# Altium PCB Sheet1.PcbDoc
Units mil, origin at the board's own origin, x right, y up, seen from the top; angles counter-clockwise.
Board outline 1640 x 1090 mil, 2 copper layers (Top Layer, Bottom Layer); 21 components, 16 nets, 60 pads, 4 vias.
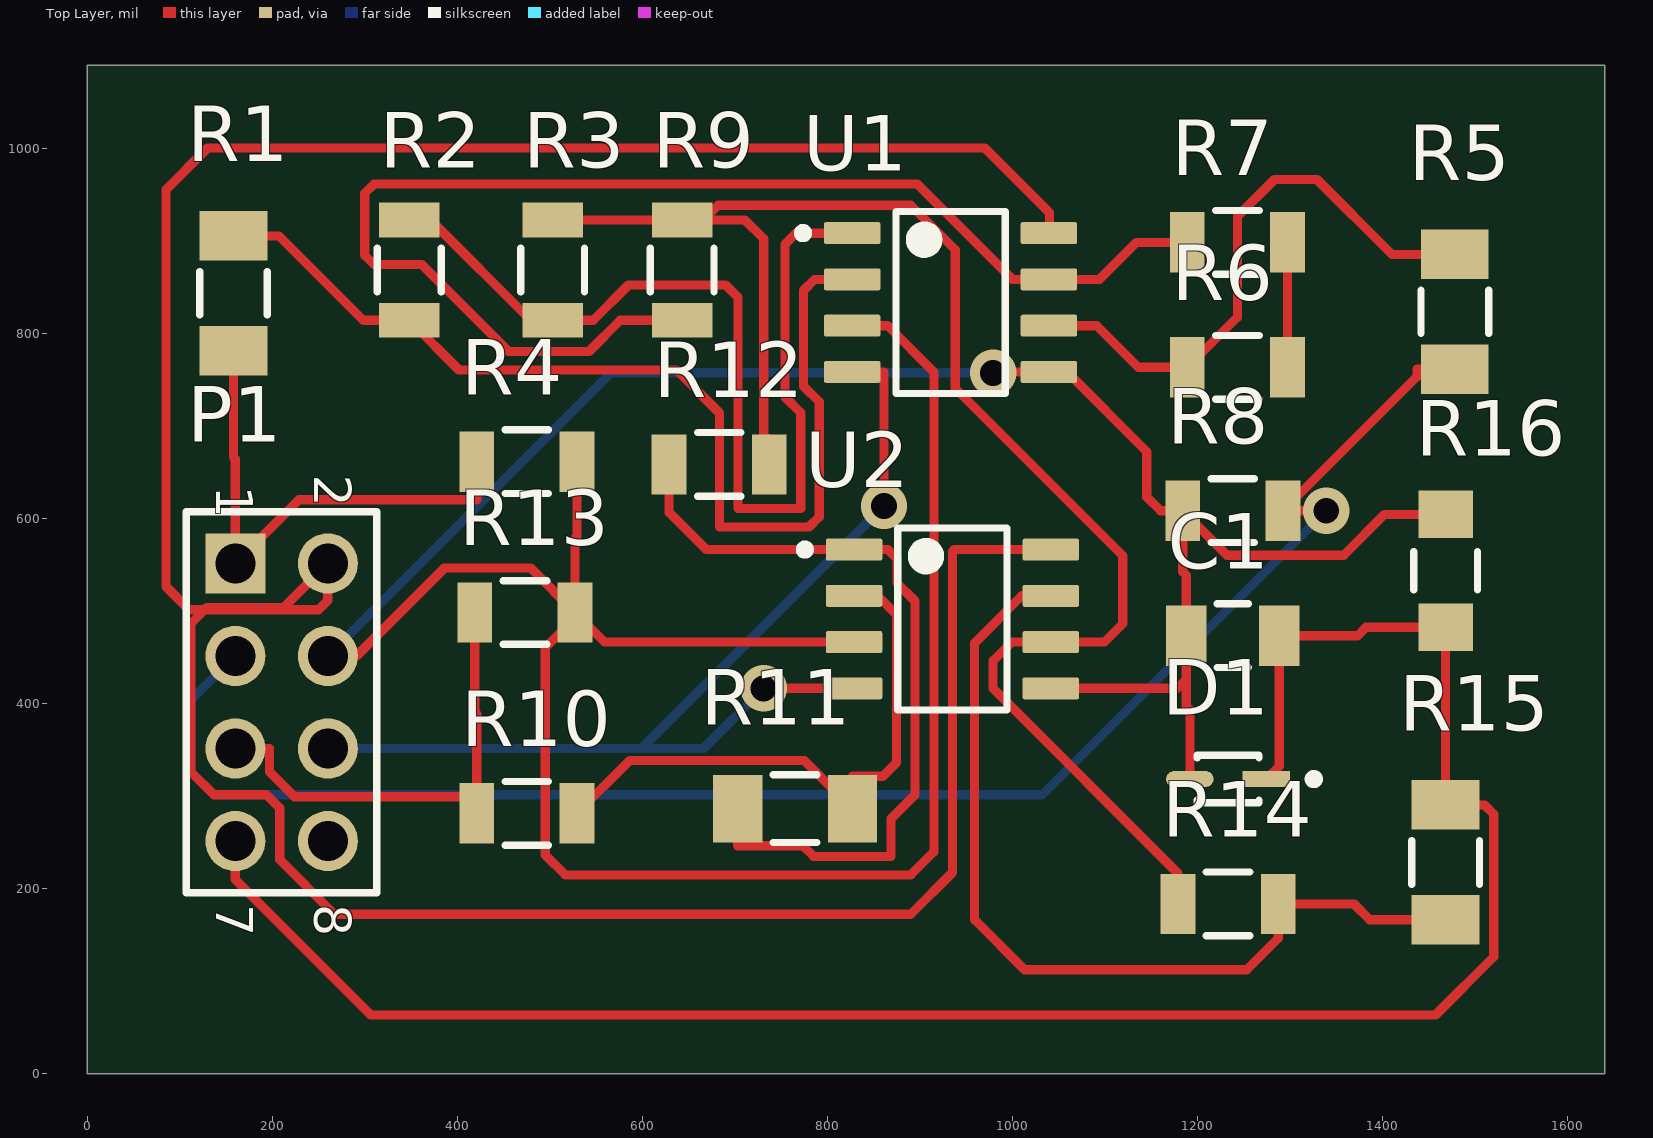
[diagram p0: Top Layer view]
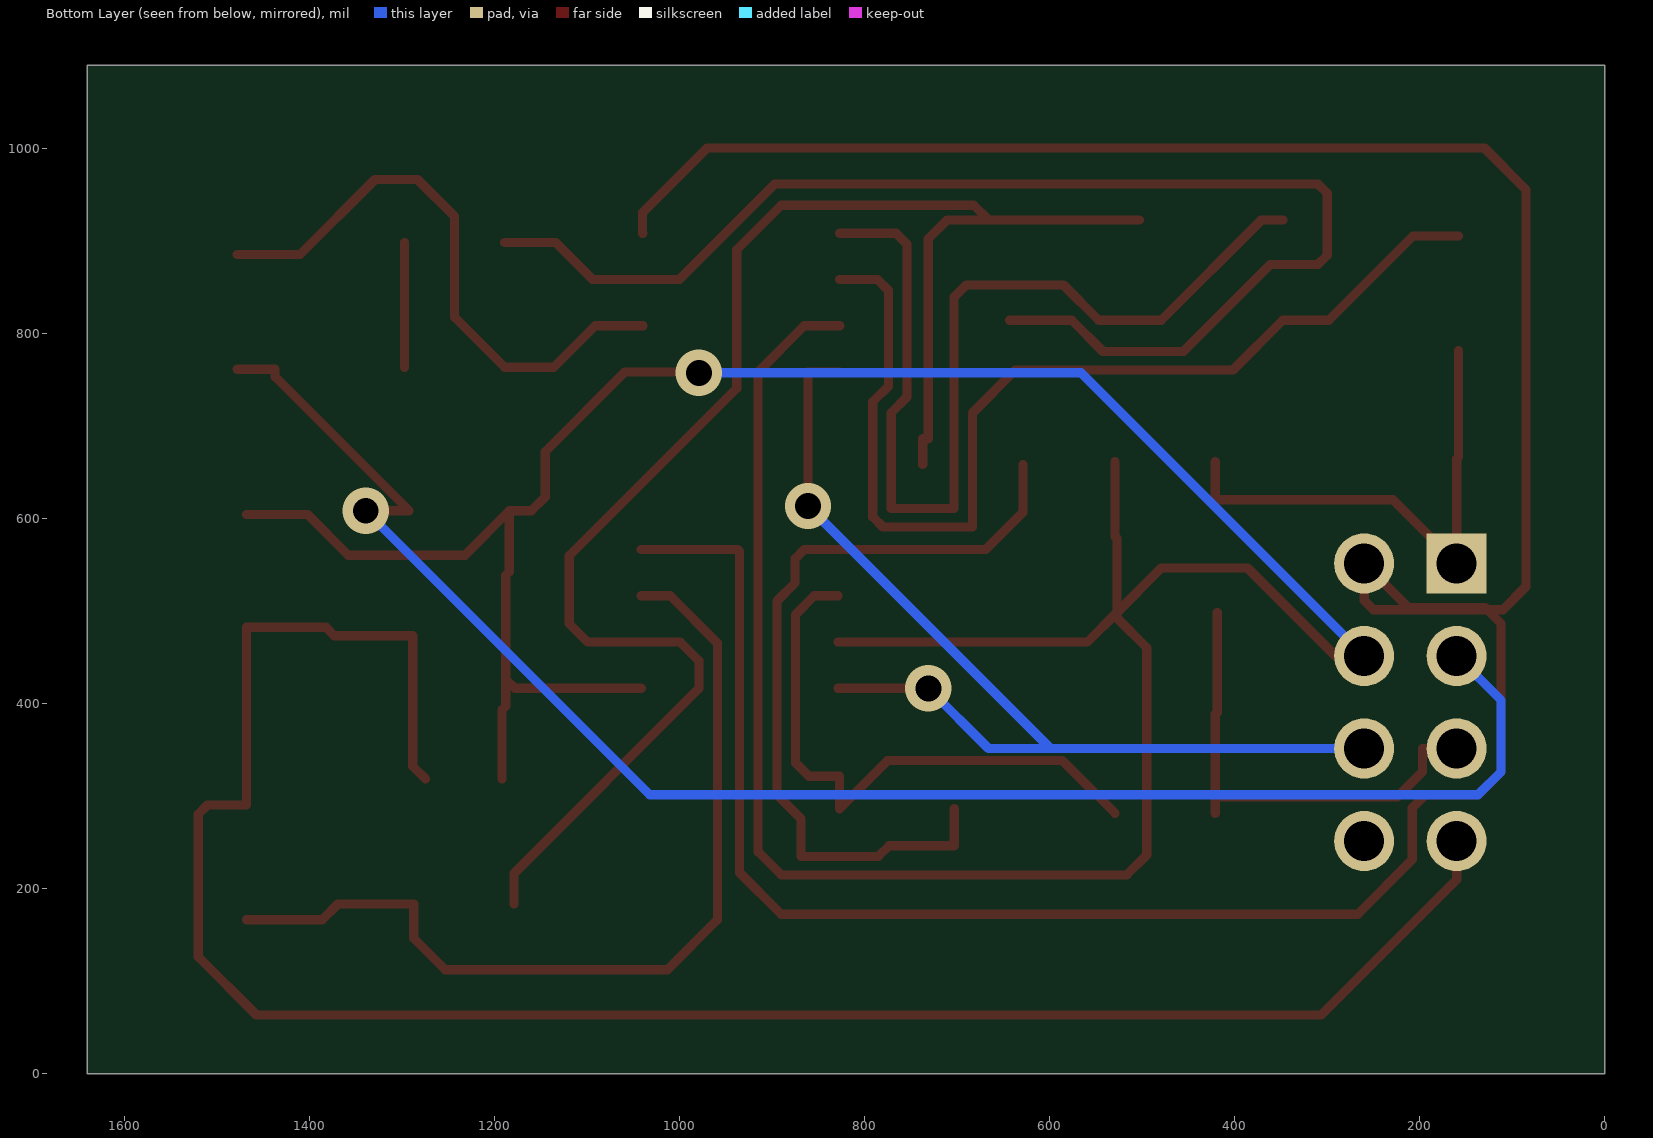
[diagram p1: Bottom Layer view, seen from below]
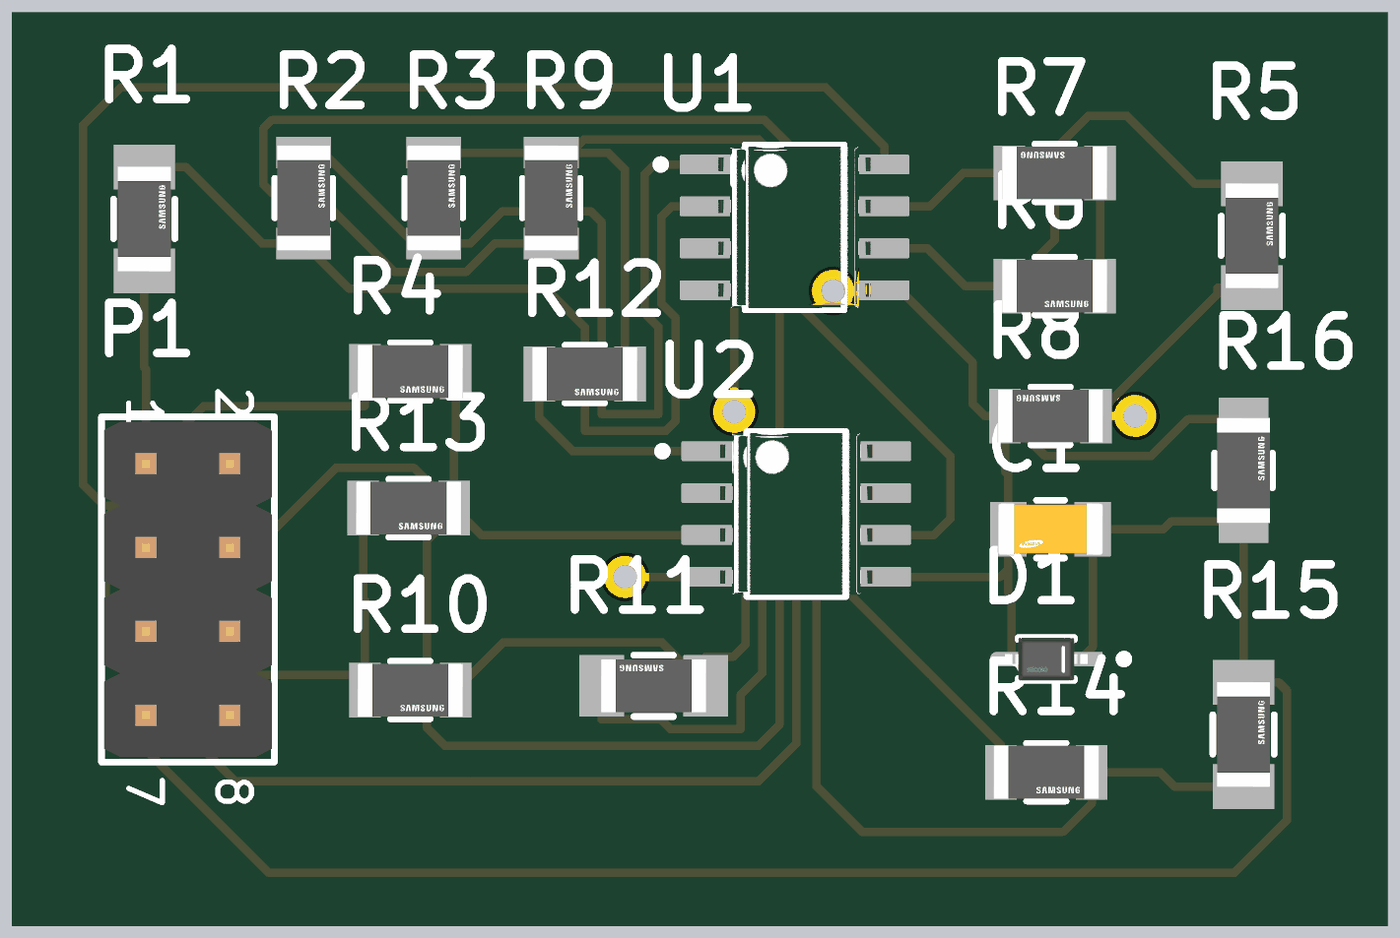
[diagram p2: 3D render of the assembled board from above, using the file's embedded part models]

## Layer stack, top to bottom
Top Solder: solder mask 0.4, Solder Resist, Dk 3.5
Top Layer: signal copper 1.4
Dielectric 1: dielectric 12.6, FR-4, Dk 4.8
Bottom Layer: signal copper 1.4
Bottom Solder: solder mask 0.4, Solder Resist, Dk 3.5

## Board outline
0,0 1640,0 1640,1090 0,1090

## Design rules (kind name [scope] priority, off if disabled: settings)
Clearance [All] p1: gap=10 ignorepadtopadclearanceinfootprint=FALSE except(0: Arc-Hole Track-Hole SMDPad-Hole THPad-Hole Via-Hole Fill-Hole Poly-Hole Region-Hole Text-Hole)
PolygonConnect [All] p1: connectstyle=Relief reliefconductorwidth=10 reliefentries=4 polygonreliefangle="90 Angle" airgapwidth=10
RoomDefinition Sheet1 [InComponentClass('Sheet1')] p1: confinementstyle=ConfineIn formatcopy=TRUE lockcomponents=FALSE outline 18,8.58 1633,8.58 1633,1078.58 18,1078.58
RoutingVias [All] p1: holewidth=28 width=50 viastyle="Through Hole" minholewidth=28 minwidth=50 maxholewidth=28 maxwidth=50
SolderMaskExpansion [All] p1: expansion=4 istentingtop=FALSE
Width [All] p1: maxlimit=10 minlimit=10 preferedwidth=10
30 further rules are at their usual default settings.

## Components (designator, comment, footprint, x,y, rotation, side; value= is the part's Value field where it differs from the comment)
C1 "CL31B333JBCNNNC" FP-CL31-IPC_C 1238,473.58 r180 top
D1 "BZT52C2V4S-7-F" FP-SOD323-IPC_B 1233,318.58 r180 top
P1 "61300821121" 61300821121 210,401.58 r270 top
R1 "RC3216J333CS" FP-RC3216-IPC_A 158,843.58 r90 top
R2 "RC3216J103CS" FP-RC3216-IPC_C 348,868.58 r90 top
R3 "RC3216J103CS" FP-RC3216-IPC_C 503,868.58 r90 top
R4 "RC3216J103CS" FP-RC3216-IPC_C 475,661.58 r0 top
R5 "RC3216J513CS" FP-RC3216-IPC_A 1478,823.58 r90 top
R6 "RC3216J103CS" FP-RC3216-IPC_C 1243,763.58 r0 top
R7 "RC3216J103CS" FP-RC3216-IPC_C 1243,898.58 r180 top
R8 "RC3216J103CS" FP-RC3216-IPC_C 1238,608.58 r180 top
R9 "RC3216J103CS" FP-RC3216-IPC_C 643,868.58 r90 top
R10 "RC3216J103CS" FP-RC3216-IPC_C 475,281.58 r0 top
R11 "RC3216J202CS" FP-RC3216-IPC_A 765,286.58 r180 top
R12 "RC3216J103CS" FP-RC3216-IPC_C 683,658.58 r0 top
R13 "RC3216J103CS" FP-RC3216-IPC_C 473,498.58 r0 top
R14 "RC3216J103CS" FP-RC3216-IPC_C 1233,183.58 r0 top
R15 "RC3216J202CS" FP-RC3216-IPC_A 1468,228.58 r90 top
R16 "RC3216J105CS" FP-RC3216-MFG 1468,543.58 r90 top
U1 "LM358DR" FP-D0008A-MFG 933,833.58 r0 top
U2 "LM358DR" FP-D0008A-MFG 935,491.58 r0 top

## Footprints (in the part's own frame and the unit in brackets; to place one, negate y for a bottom-side part, rotate by r counter-clockwise, add the part's x,y. Pads: shape width x height; smd on the part's side, far side on the other; paste and mask are expansions set on the pad)
61300821121 [mm] "Pin Header, pitch 2.54 mm, THT, Vertical, dual row, 8p"
  rect 1.65x1.65 hole 1.1: 1(-3.81,-1.27)
  round 1.65 hole 1.1: 2(-3.81,1.27) 3(-1.27,-1.27) 4(-1.27,1.27) 5(1.27,-1.27) 6(1.27,1.27) 7(3.81,-1.27) 8(3.81,1.27)
  silkscreen extent -5.23,-2.61 5.23,2.61, body extent -5.08,-2.54 5.08,2.54, height 8.59
FP-CL31-IPC_C [mil]
  rect 43.52x65.28 smd paste+0 mask+0: 1(-50.25,0) 2(50.25,0)
  silkscreen extent -17,-34 17,34, body extent -76,-38 76,38, height 10
FP-D0008A-MFG [mm]
  rrect17% 1.55x0.6 smd paste+0 mask+0: 1(-2.7,1.905) 2(-2.7,0.635) 3(-2.7,-0.635) 4(-2.7,-1.905) 5(2.7,-1.905) 6(2.7,-0.635) 7(2.7,0.635) 8(2.7,1.905)
  silkscreen extent -4.17,-2.5 1.5,2.5, body extent -3.57,-2.75 3.57,2.75, height 0.25
FP-RC3216-IPC_A [mil]
  rect 53.34x73.16 smd paste+0 mask+0: 1(-62.03,0) 2(62.03,0)
  silkscreen extent -24,-37 24,37, body extent -108,-56 108,56, height 10
FP-RC3216-IPC_C [mil]
  rect 37.59x65.28 smd paste+0 mask+0: 1(-54.16,0) 2(54.16,0)
  silkscreen extent -24,-34 24,34, body extent -77,-38 77,38, height 10
FP-RC3216-MFG [mm]
  rect 1.3x1.5 smd paste+0 mask+0: 1(-1.55,0) 2(1.55,0)
  silkscreen extent -0.53,-0.87 0.53,0.87, body extent -2.3,-0.97 2.3,0.97, height 0.25
FP-SOD323-IPC_B [mil]
  rect 51.4x17.03 smd paste+0 mask+0: 1(-41.35,0)
  rrect100% 51.4x17.03 smd paste+0 mask+0: 2(41.35,0)
  silkscreen extent -97,-26 33,26, body extent -77,-35 77,35, height 10

## Part data
C1: library part CMP-13271-004295-1, "Cap Ceramic 33nF 50V X7R ±5% SMD 1206 +125°C Embossed T/R", Capacitance=33nF, Case Code (Imperial)=1206, Case Code (Metric)=3216, Dielectric=X7R, Max Operating Temperature=125°C, Min Operating Temperature=-55°C, Package Quantity=1, Tolerance=5%, Voltage=50V, Case/Package=1206, Construction=Flat, Depth=1.6mm, Height=0.85mm, Lead Free="Lead Free", Length=3.2mm, Mount="Surface Mount", Packaging="Tape and Reel", Radiation Hardening=No, RoHS Compliant=Yes, Series=CL, Thickness=0.039inch, Voltage Rating=50V, Voltage Rating (DC)=50V, Width=0.063inch
D1: library part CMP-12792-000028-1, "DIODE ZENER 2.4V 200MW SOD323", Max Operating Temperature=150°C, Max Power Dissipation=200mW, Max Reverse Leakage Current=50uA, Min Operating Temperature=-65°C, Output Current=50mA, Package Quantity=3000, Test Current=5mA, Tolerance=8%, Voltage Rating (DC)=2.4V, Contact Plating=Tin, Element Configuration=Single, ESD Protection=No, Height=1mm, Impedance=100R, Lead Free="Lead Free", Length=1.8mm, Mount="Surface Mount", Number of Pins=2, Packaging="Tape and Reel", Peak Reverse Current=50uA, Power Dissipation=200mW, Power Rating=200mW, Radiation Hardening=No, REACH SVHC="No SVHC", Termination=SMD/SMT, Voltage Tolerance=8%, Weight=0.000173oz, Width=1.4mm, Zener Current=5mA, Zener Voltage=2.4V
P1: library part CMP-1502-01078-1, "THT Vertical Pin Header WR-PHD, Pitch 2.54 mm, Dual Row, 8 pins", Contact Resistance=20mOhm, Manufacturer="Wurth Elektronik", Operating Temperature=-40to105degC, Rated Current=3A, Withstanding Voltage=500VAC, Working Voltage=250VAC, Datasheet URL=https://katalog.we-online.de/em/datasheet/6130xx21121.pdf, Gender=Male, Manufacturer URL=http://www.we-online.de, Mounting Technology=THT, Orientation=Vertical, Package Reference=61300821121, Packaging=Bag, Part Number=61300821121, Pin Number=8, Pitch=2.54mm, Publisher=WurthElektronik, Row Number=Dual
R1: library part CMP-13261-004051-1, "Res Thick Film 1206 33kΩ 5% 0.25W ±100ppm/°C Molded SMD T/R", Case Code (Imperial)=1206, Case Code (Metric)=3216, Max Operating Temperature=155°C, Max Power Dissipation=250mW, Min Operating Temperature=-55°C, Resistance=33kR, Temperature Coefficient=100ppm/°C, Tolerance=5%, Voltage Rating (DC)=200V, Case/Package=1206, Composition="Thick Film", Contact Plating=Tin, Features="Moisture Resistant", Height=0.026inch, Lead Free="Lead Free", Length=0.126inch, Number of Terminations=2, Packaging="Tape and Reel", Power Rating=250mW, Radiation Hardening=No, Width=0.063inch
R2 R3 R4 R6 R7 R8 R9 R10 R12 R13 R14: library part CMP-13261-005388-1, "Res Thick Film 1206 10kΩ 5% 0.25W ±100ppm/°C Molded SMD T/R", Case Code (Imperial)=1206, Case Code (Metric)=3216, Max Operating Temperature=155°C, Max Power Dissipation=250mW, Min Operating Temperature=-55°C, Resistance=10kR, Temperature Coefficient=100ppm/°C, Tolerance=5%, Voltage Rating (DC)=200V, Case/Package=1206, Composition="Thick Film", Contact Plating=Tin, Depth=1.6mm, Features="Moisture Resistant", Height=0.026inch, Lead Free="Lead Free", Length=0.126inch, Military Standard=Not, Number of Terminations=2, Packaging="Tape and Reel", Radiation Hardening=No, Width=0.063inch
R5: library part CMP-13261-005323-1, "Res Thick Film 1206 51kΩ 5% 0.25W ±100ppm/°C Molded SMD T/R", Case Code (Imperial)=1206, Case Code (Metric)=3216, Max Operating Temperature=155°C, Max Power Dissipation=250mW, Min Operating Temperature=-55°C, Resistance=51kR, Temperature Coefficient=100ppm/°C, Tolerance=5%, Voltage Rating (DC)=200V, Case/Package=1206, Composition="Thick Film", Contact Plating=Tin, Features="Moisture Resistant", Height=0.026inch, Lead Free="Lead Free", Length=0.126inch, Number of Terminations=2, Packaging="Tape and Reel", Power Rating=250mW, Radiation Hardening=No, Width=0.063inch
R11 R15: library part CMP-13261-004107-1, "Res Thick Film 1206 2kΩ 5% 0.25W ±100ppm/°C Molded SMD T/R", Case Code (Imperial)=1206, Case Code (Metric)=3216, Max Operating Temperature=155°C, Max Power Dissipation=250mW, Min Operating Temperature=-55°C, Resistance=2kR, Temperature Coefficient=100ppm/°C, Tolerance=5%, Voltage Rating (DC)=200V, Case/Package=1206, Composition="Thick Film", Contact Plating=Tin, Depth=1.6mm, Features="Moisture Resistant", Height=0.026inch, Lead Free="Lead Free", Length=0.126inch, Number of Terminations=2, Packaging="Tape and Reel", Radiation Hardening=No, Width=0.063inch
R16: library part CMP-13261-004533-1, "Res Thick Film 1206 1MΩ 5% 0.25W ±100ppm/°C Molded SMD T/R", Case Code (Imperial)=1206, Case Code (Metric)=3216, Max Operating Temperature=155°C, Max Power Dissipation=250mW, Min Operating Temperature=-55°C, Package Quantity=1, Resistance=1MR, Temperature Coefficient=100ppm/°C, Tolerance=5%, Voltage Rating (DC)=200V, Case/Package=1206, Composition="Thick Film", Contact Plating=Tin, Depth=1.6mm, Features="Moisture Resistant", Height=0.026inch, Lead Free="Lead Free", Length=0.126inch, Military Standard=Not, Number of Terminations=2, Packaging="Tape and Reel", Radiation Hardening=No, Width=0.063inch
U1 U2: library part CMP-1685-00009-2, "IC OPAMP GP 2 CIRCUIT 8SOIC", Case/Package=SOIC, Dual Supply Voltage=9V, Input Bias Current=250nA, Input Offset Voltage (Vos)=7mV, Max Dual Supply Voltage=16V, Max Operating Temperature=70°C, Max Supply Voltage=32V, Min Dual Supply Voltage=1.5V, Min Operating Temperature=0°C, Min Supply Voltage=3V, Nominal Supply Current=1.2mA, Operating Supply Current=1mA, Output Current=30mA, Package Quantity=2500, Power Supply Rejection Ratio (PSRR)=65dB, Voltage Gain=100dB, Bandwidth=700kHz, Common Mode Rejection Ratio=65dB, Contact Plating=Gold, Gain Bandwidth Product=700kHz, Height=1.58mm, Lead Free="Lead Free", Length=4.9mm, Mount="Surface Mount", Number of Amplifiers=2, Number of Channels=2, Number of Circuits=2, Number of Elements=2, Number of Pins=8, Operating Supply Voltage=16V, Output Current per Channel=30mA, Packaging="Tape and Reel", Radiation Hardening=No, REACH SVHC="No SVHC", Slew Rate=0.3V/µs, Unity Gain Bandwidth Product=700kHz, Width=3.91mm

## Via types
v1: diameter 50, hole 28, Top Layer to Bottom Layer, 4 vias

## Nets (pads, with @x,y where several pads share a name; then routed paths per layer and width w, separated by ;. In a path a pad name is that pad's centre, name@x,y a point inside that pad or via, vN(x,y) a via of type N, cw(c..) or ccw(c..) an arc to the next point about the centre after c; other vN are vias at no path point)
+5: P1.2 U1.8 U2.8 | length 3410.9
  Top Layer w10: U1.8 1040,908.58 1040,930.58 970,1000.58 130,1000.58 85,955.58 85,526.58 110,501.58 127,501.58 ; U2.8 937,566.58 935,564.58 935,217.58 890,172.58 267,172.58 208,231.58 208,287.29 193.71,301.58 137,301.58 112,326.58 112,486.58 127,501.58 ; 127,501.58 250,501.58 260,511.58 P1.2 212,503.58 129,503.58 127,501.58
-5: P1.6 U1.4 U2.4 | length 1145.4
  Top Layer w10: v1(731,416.58) U2.4 ; U1.4 861,758.58 v1(861,613.58)
  Bottom Layer w10: P1.6 599,351.58 ; v1(731,416.58) 666,351.58 599,351.58 ; v1(861,613.58) 599,351.58
GND: C1.2 D1.2 P1.4 R4.2 R8.2 R13.2 R16.2 U1.3 U1.5 U2.3 U2.5 | length 4055.2
  Top Layer w10: P1.4 291,451.58 386,546.58 479.16,546.58 R13.2 ; R4.2 529.16,580.58 527.16,578.58 R13.2 ; U1.3 865,808.58 915,758.58 915,240 890,215 516.58,215 495,236.58 495,460.42 527.16,492.58 R13.2 ; U2.3 559.16,466.58 R13.2 ; v1(979,757.58) 980,758.58 U1.5 1059,758.58 1145.17,672.41 1145.17,623.41 1160,608.58 R8.2 ; U2.5 1177.75,416.58 1187.75,426.58 ; D1.2 1191.65,393.58 1187.75,397.48 1187.75,426.58 ; R16.2 1402.02,604.6 1358,560.58 1231.84,560.58 R8.2 ; R8.2 1183.84,542.49 1187.75,538.58 C1.2 1187.75,426.58
  Bottom Layer w10: P1.4 566,757.58 v1(979,757.58)
NetC1_1: C1.1 D1.1 P1.7 R15.2 R16.1 | length 2234.6
  Top Layer w10: P1.7 160,210.04 306.46,63.58 1457,63.58 1520,126.58 1520,280.61 1510,290.61 R15.2 R16.1 1381.98,482.56 1373,473.58 C1.1 1288.25,332.48 D1.1
NetP1_1: P1.1 R1.1 R4.1 | length 561.3
  Top Layer w10: R1.1 158,666.58 160,664.58 P1.1 228.84,620.42 420.84,620.42 R4.1
NetP1_3: P1.3 R5.1 R8.1 | length 1810.2
  Top Layer w10: v1(1339,608.58) R8.1 1437,753.42 1437,761.55 R5.1
  Bottom Layer w10: P1.3 112,403.58 112,326.58 137,301.58 1032,301.58 v1(1339,608.58)
NetP1_5: P1.5 R10.1 R13.1 | length 514.9
  Top Layer w10: P1.5 197,351.58 197,326.58 224,299.58 R10.1@420.84,299.58 ; R13.1 418.84,390.58 420.84,388.58 R10.1@420.84,299.58 ; R10.1 R10.1@420.84,299.58
NetR1_2: R1.2 R2.1 U1.2 | length 1149.3
  Top Layer w10: R1.2 207,905.61 298.19,814.42 R2.1 401.8,760.62 636.96,760.62 683.36,714.22 683.36,590.94 780,590.94 790.96,601.9 790.96,726.22 774.08,743.1 774.08,846.58 786.08,858.58 U1.2
NetR2_2: R2.2 R3.1 U1.1 | length 1087.8
  Top Layer w10: R2.2 371,922.74 479.32,814.42 R3.1 546.84,814.42 585,852.58 690,852.58 703.36,839.22 703.36,610.94 770.96,610.94 770.96,714.58 754,731.54 754,896.58 766,908.58 U1.1
NetR3_2: R3.2 R9.2 R12.2 R14.1 U2.6 | length 1766.2
  Top Layer w10: R3.2 R9.2 R9.2@666,922.74 ; R12.2 737.16,686.22 731,686.22 731,902.38 710.64,922.74 R9.2@666,922.74 ; R14.1 1178.84,216.58 979,416.42 979,446.58 999,466.58 U2.6 1099,466.58 1119,486.58 1119,559.78 938,740.78 938,890.58 890,938.58 681.84,938.58 R9.2@666,922.74
NetR5_2: R5.2 R6.1 U1.6 | length 638.7
  Top Layer w10: U1.6 1091,808.58 1136,763.58 R6.1 1243,817.74 1243,926.58 1283,966.58 1329,966.58 1409.97,885.61 R5.2
NetR6_2: R6.2 R7.1 | length 135
  Top Layer w10: R6.2 R7.1
NetR7_2: R7.2 R9.1 U1.7 | length 1419.3
  Top Layer w10: R9.1 576,814.42 542.2,780.62 455.36,780.62 361.4,874.58 310,874.58 300,884.58 300,951.58 310,961.58 897,961.58 1000,858.58 U1.7 1094,858.58 1134,898.58 R7.2
NetR10_2: R10.2 R11.1 U2.2 | length 646
  Top Layer w10: R10.2 586.16,338.58 775.03,338.58 R11.1 827.03,321.58 860,321.58 874.65,336.23 874.65,496.14 854.21,516.58 U2.2
NetR11_2: R11.2 R12.1 U2.1 | length 869.9
  Top Layer w10: R12.1 628.84,606.58 668.84,566.58 U2.1 865,566.58 875,556.58 875,530.58 894.65,510.93 894.65,301.58 868.71,275.64 868.71,235 785,235 773.42,246.58 702.97,246.58 R11.2
NetR14_2: R14.2 R15.1 U2.7 | length 991.9
  Top Layer w10: U2.7 1010,516.58 959,465.58 959,166.58 1013,112.58 1253.16,112.58 1287.16,146.58 R14.2 1369,183.58 1386.03,166.55 R15.1
pads on no net: P1.8

## Silkscreen, mask and mechanical layers (free items; w line width, h text height)
Mechanical 1:
  the board outline again, w47.24

## Text inside footprints (layer, text, board x,y; h text height)
P1: Top Overlay "8" at 245.43,183.47 h40 r270; Top Overlay "7" at 139.13,183.47 h40 r270; Top Overlay "2" at 245.43,647.25 h40 r270; Top Overlay "1" at 139.13,635.44 h40 r270